# EAGLE board Qduino_Mini_Panel_v10 (EAGLE 7.3.0), part 1 of 11
DESIGNER: Quin from Qtechknow; VERSION: v10
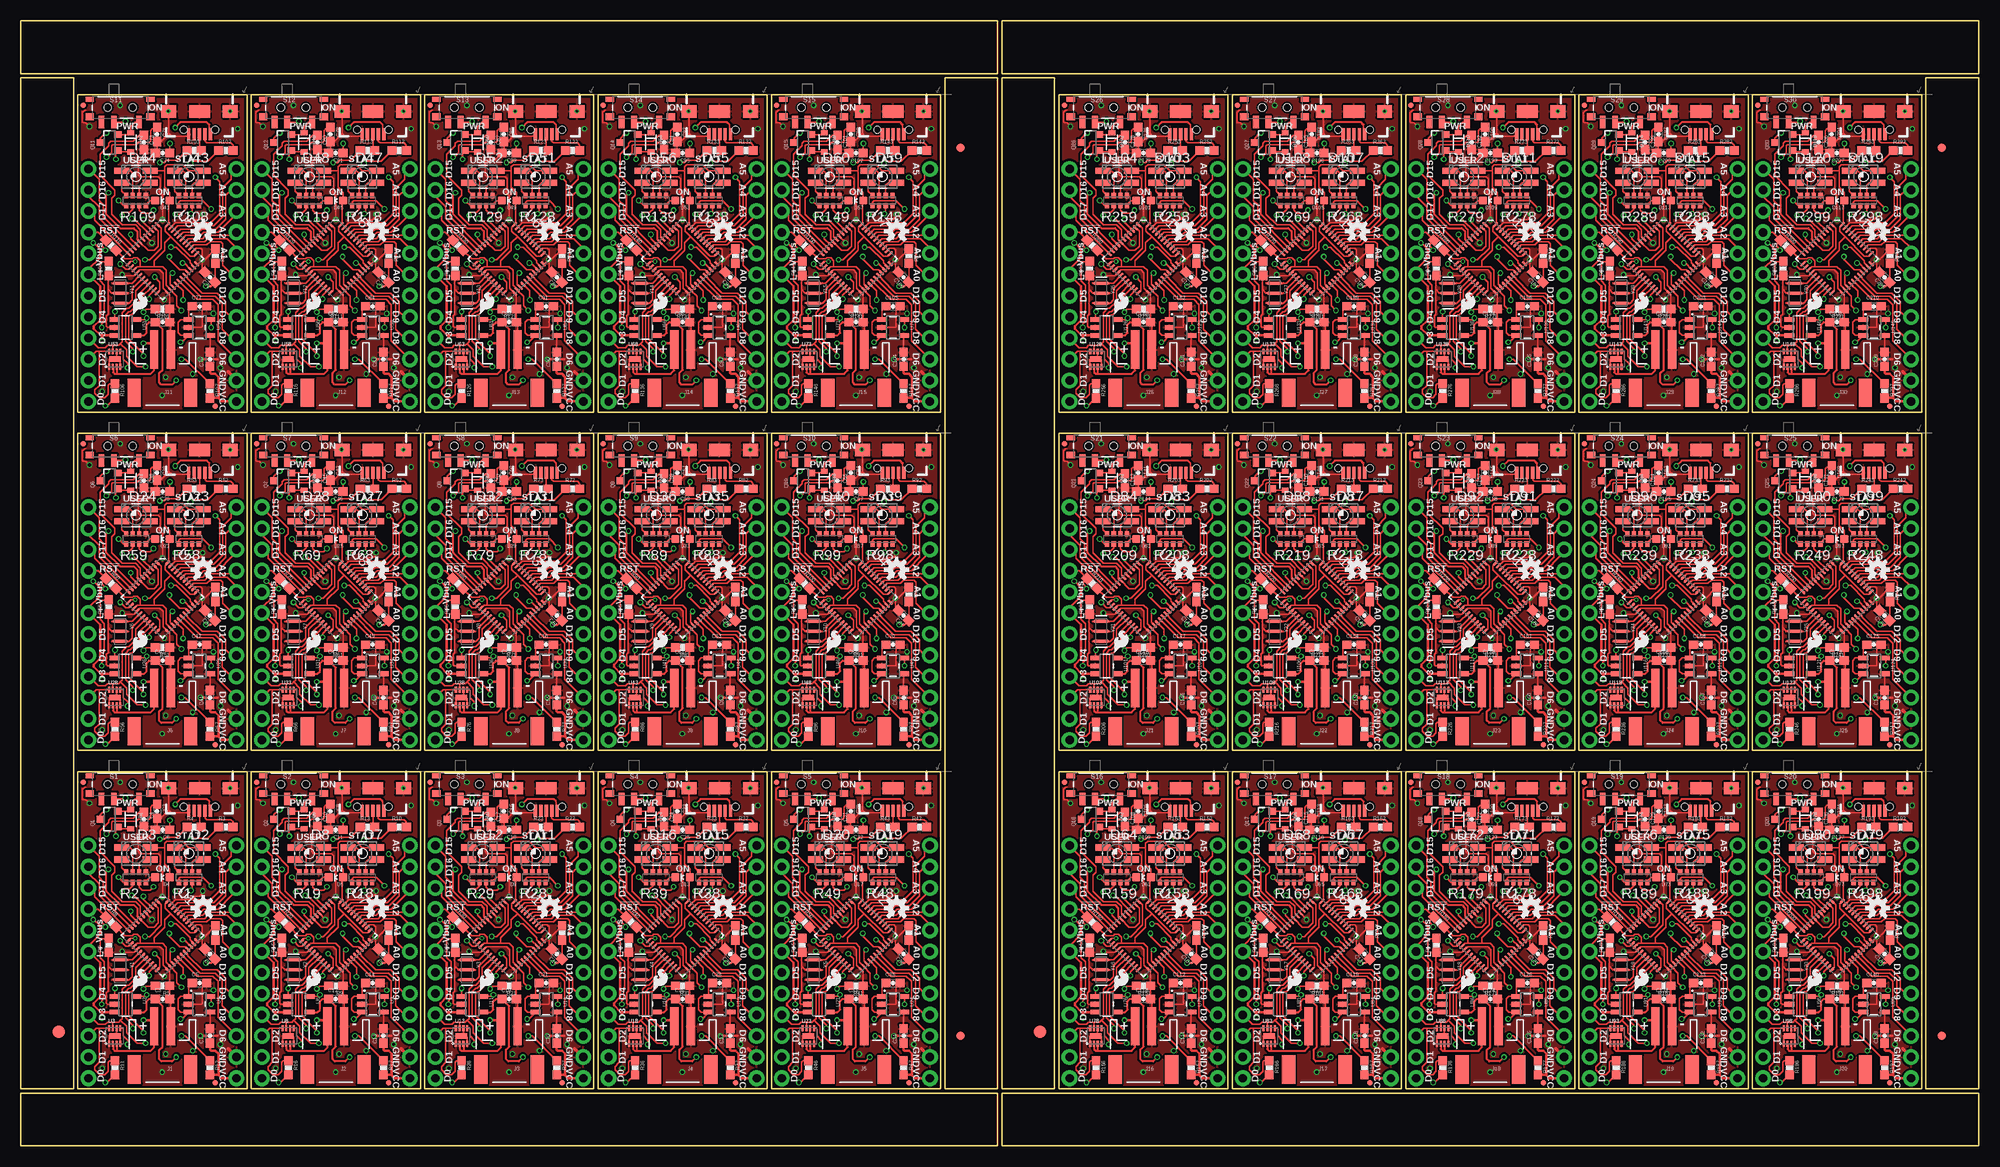
[diagram p0: board, top side]
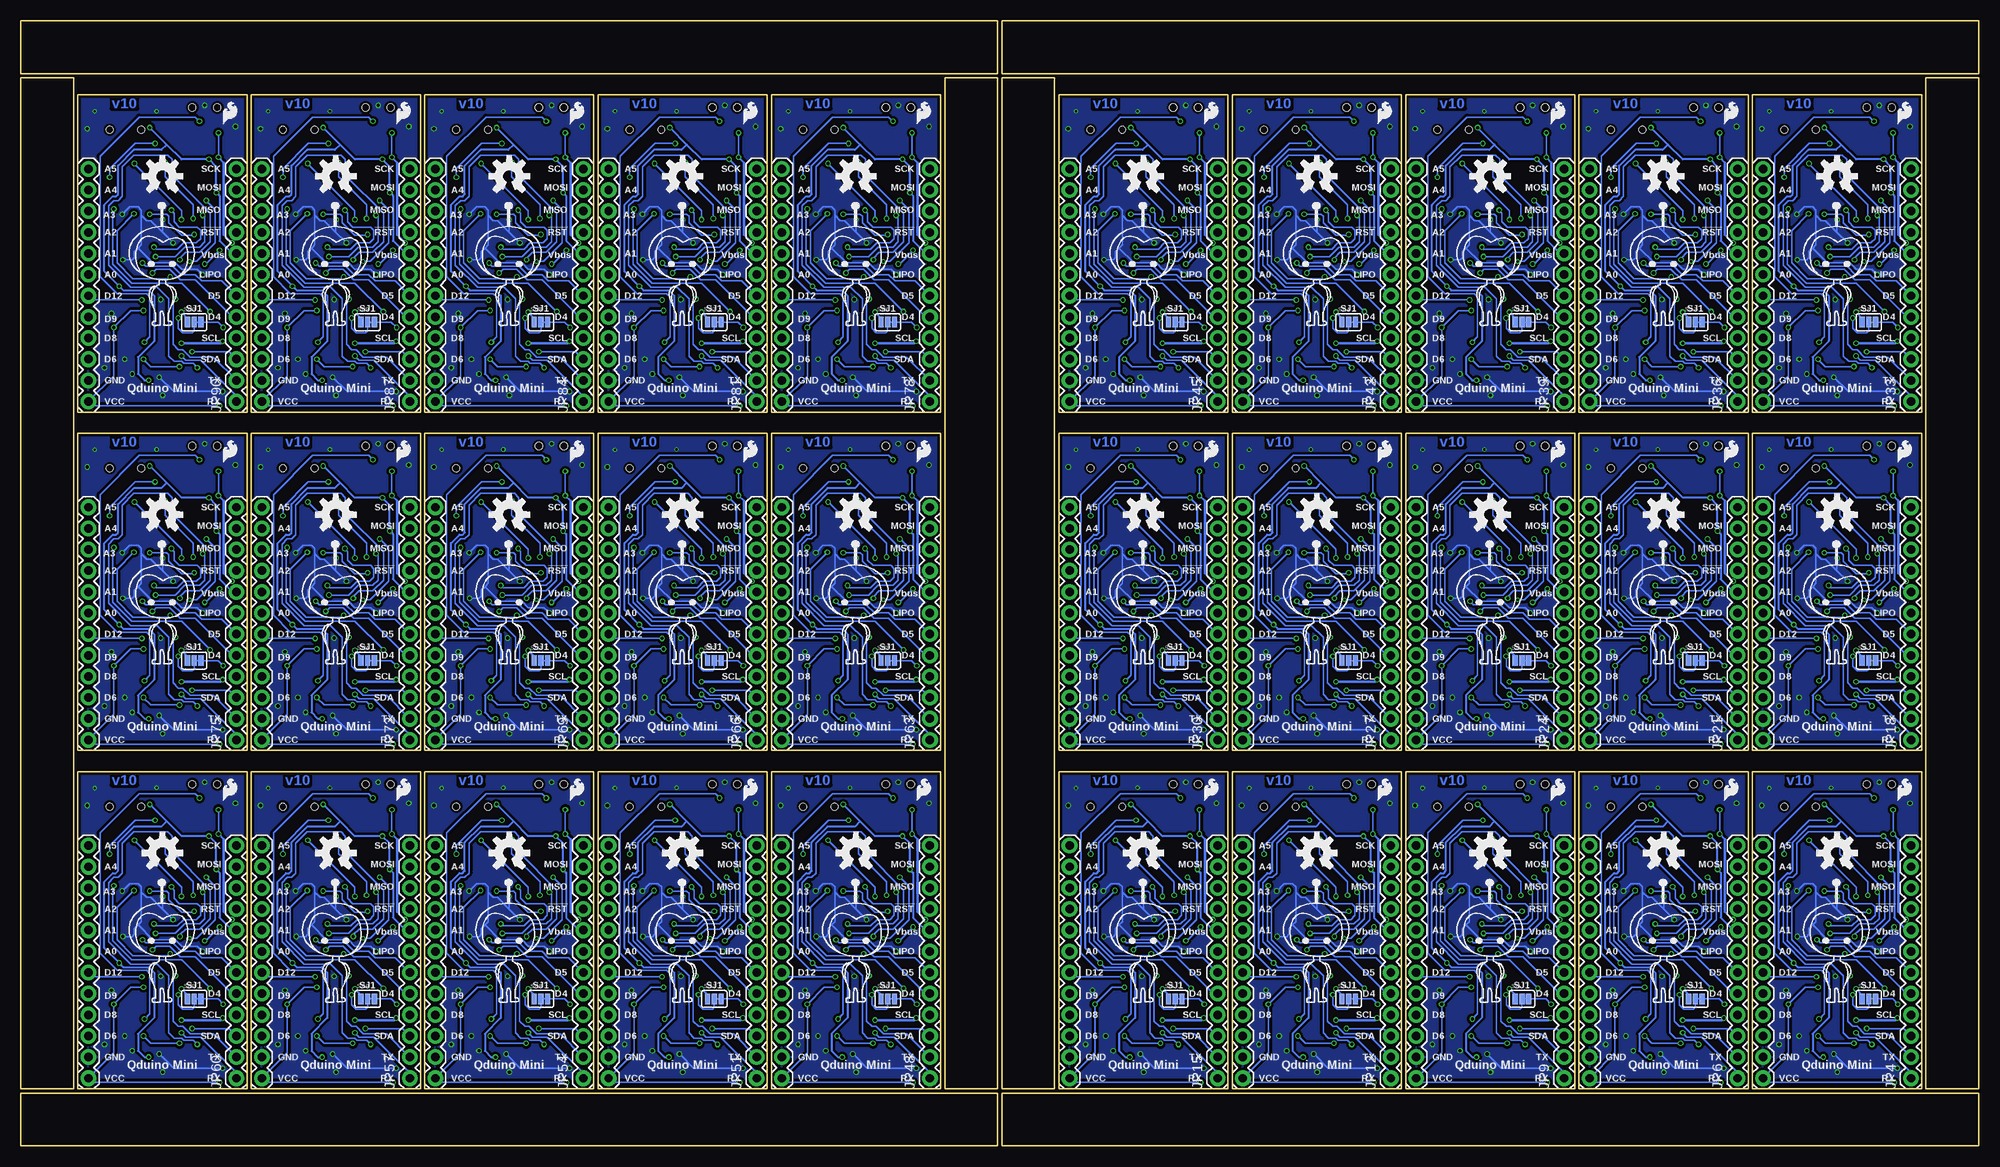
[diagram p1: board, bottom side, seen from below]

Size 235.2 x 135.13 mm. Coordinates in mm from the lower left corner, seen from the top.
Outline: 6.86,44.96 6.86,6.86 27.18,6.86 27.18,44.96 6.86,44.96
Outline: 27.69,44.96 27.69,6.86 48.01,6.86 48.01,44.96 27.69,44.96
Outline: 48.51,44.96 48.51,6.86 68.83,6.86 68.83,44.96 48.51,44.96
Outline: 69.34,44.96 69.34,6.86 89.66,6.86 89.66,44.96 69.34,44.96
Outline: 90.17,44.96 90.17,6.86 110.49,6.86 110.49,44.96 90.17,44.96
Outline: 6.86,85.6 6.86,47.5 27.18,47.5 27.18,85.6 6.86,85.6
Outline: 27.69,85.6 27.69,47.5 48.01,47.5 48.01,85.6 27.69,85.6
Outline: 48.51,85.6 48.51,47.5 68.83,47.5 68.83,85.6 48.51,85.6
Outline: 69.34,85.6 69.34,47.5 89.66,47.5 89.66,85.6 69.34,85.6
Outline: 90.17,85.6 90.17,47.5 110.49,47.5 110.49,85.6 90.17,85.6
Outline: 6.86,126.24 6.86,88.14 27.18,88.14 27.18,126.24 6.86,126.24
Outline: 27.69,126.24 27.69,88.14 48.01,88.14 48.01,126.24 27.69,126.24
Outline: 48.51,126.24 48.51,88.14 68.83,88.14 68.83,126.24 48.51,126.24
Outline: 69.34,126.24 69.34,88.14 89.66,88.14 89.66,126.24 69.34,126.24
Outline: 90.17,126.24 90.17,88.14 110.49,88.14 110.49,126.24 90.17,126.24
Outline: 6.35,6.86 6.35,128.27 0,128.27 0,6.86 6.35,6.86
Outline: 0,0 117.35,0 117.35,6.35 0,6.35 0,0
Outline: 117.35,6.86 117.35,128.27 111,128.27 111,6.86 117.35,6.86
Outline: 117.35,135.13 0,135.13 0,128.78 117.35,128.78 117.35,135.13
Outline: 124.71,44.96 124.71,6.86 145.03,6.86 145.03,44.96 124.71,44.96
Outline: 145.54,44.96 145.54,6.86 165.86,6.86 165.86,44.96 145.54,44.96
Outline: 166.37,44.96 166.37,6.86 186.69,6.86 186.69,44.96 166.37,44.96
Outline: 187.2,44.96 187.2,6.86 207.52,6.86 207.52,44.96 187.2,44.96
Outline: 208.03,44.96 208.03,6.86 228.35,6.86 228.35,44.96 208.03,44.96
Outline: 124.71,85.6 124.71,47.5 145.03,47.5 145.03,85.6 124.71,85.6
Outline: 145.54,85.6 145.54,47.5 165.86,47.5 165.86,85.6 145.54,85.6
Outline: 166.37,85.6 166.37,47.5 186.69,47.5 186.69,85.6 166.37,85.6
Outline: 187.2,85.6 187.2,47.5 207.52,47.5 207.52,85.6 187.2,85.6
Outline: 208.03,85.6 208.03,47.5 228.35,47.5 228.35,85.6 208.03,85.6
Outline: 124.71,126.24 124.71,88.14 145.03,88.14 145.03,126.24 124.71,126.24
Outline: 145.54,126.24 145.54,88.14 165.86,88.14 165.86,126.24 145.54,126.24
Outline: 166.37,126.24 166.37,88.14 186.69,88.14 186.69,126.24 166.37,126.24
Outline: 187.2,126.24 187.2,88.14 207.52,88.14 207.52,126.24 187.2,126.24
Outline: 208.03,126.24 208.03,88.14 228.35,88.14 228.35,126.24 208.03,126.24
Outline: 124.21,6.86 124.21,128.27 117.86,128.27 117.86,6.86 124.21,6.86
Outline: 117.86,0 235.2,0 235.2,6.35 117.86,6.35 117.86,0
Outline: 235.2,6.86 235.2,128.27 228.85,128.27 228.85,6.86 235.2,6.86
Outline: 235.2,135.13 117.86,135.13 117.86,128.78 235.2,128.78 235.2,135.13
Copper layers (1*16): Top 0.035mm / dielectric 1.5mm / Bottom 0.035mm
Design rules "Gold_Phoenix_Standard_Spec_2_layer": minimum track width 5mil, minimum drill 6mil, track to track 5mil, track to pad 5mil, pad to pad 5mil, via to via 5mil, smd to smd 5mil, copper to edge 8mil, drill to drill 8mil, minimum pad ring 5mil, minimum via ring 5mil, stop-mask expansion 4mil, vias tented up to drill 20mil, thermal gap 10mil
Net classes: 2 gnd: width 0.254 mm, drill 0.61 mm, clearance 0.254 mm

## Footprints (pad centres in the part's own frame; a part is rotated, then mirrored left to right if it is on the bottom)
0603-CAP = smd 1.1 x 1: 1 -0.85,0; 2 0.85,0
SOD-323 = smd 0.63 x 0.83: A 1.15,0; C -1.15,0
P-LCC-4-3 = smd 0.75 x 1.8: 1 0.725,1.7; 2 -0.725,1.7; 3 -0.725,-1.7; 4 0.725,-1.7
LED-0603 = smd 1 x 1: A 0,-0.877; C 0,0.877
FIDUCIAL-1.5X3 = smd 1.5 x 1.5: 1 0,0
FIDUCIAL-1X2 = smd 1 x 1: 1 0,0
MICRO-FIDUCIAL = smd 0.635 x 0.635: 1 0,0
JST-2-SMD = smd 1 x 4.6: 1 -1,-3.7; 2 1,-3.7 | smd 1.6 x 3.4: NC1 -3.4,1.5; NC2 3.4,1.5
USB-B-MICRO-SMD_V03 = smd 1.45 x 0.4: D+1 2.725,0; D-1 2.725,0.65; GND1 2.725,-1.3; ID1 2.725,-0.65; VBUS1 2.725,1.3 | smd 1.5 x 1.8: SHIELD1 0,3.685; SHIELD2 0,-3.685 | smd 1.5 x 2.5: SHIELD3 0,0 | hole 0.85: 2.2,1.9; 2.2,-1.9
1X12 = drill 1.016 pad 1.88: 1 0,0; 2 2.54,0; 3 5.08,0; 4 7.62,0; 5 10.16,0; 6 12.7,0; 7 15.24,0; 8 17.78,0; 9 20.32,0; 10 22.86,0; 11 25.4,0; 12 27.94,0
SOT23-3 = smd 0.8 x 0.9: 1 -0.95,-1; 2 0.95,-1; 3 0,1.1
0603-ARV = smd 0.5 x 0.65: 1 -1.2,-0.625; 2 -0.4,-0.625; 3 0.4,-0.625; 4 1.2,-0.625; 5 1.2,0.625; 6 0.4,0.625; 7 -0.4,0.625; 8 -1.2,0.625
0603-RES = smd 1.1 x 1: 1 -0.85,0; 2 0.85,0
SWITCH-SPST-SMD-A = smd 0.7 x 1.5: 1 -2.25,-1.75; 2 -0.75,-1.75; 3 2.25,-1.75 | smd 1 x 0.6: GND1 -3.65,1; GND3 3.65,1 | smd 1 x 0.8: GND2 -3.65,-1.1; GND4 3.65,-1.1 | hole 0.9: -1.5,0; 1.5,0
PAD-JUMPER-3-2OF3_NC_BY_TRACE_YES_SILK_FULL_BOX = smd 0.635 x 1.27: 1 -0.813,0; 2 0,0; 3 0.813,0
QFN-44-NOPAD_1:1-LESS_PASTE = smd 0.8 x 0.3: 1 -3.337,2.458; 2 -3.337,1.958; 3 -3.337,1.479; 4 -3.337,0.979; 5 -3.337,0.5; 6 -3.337,0; 7 -3.337,-0.5; 8 -3.337,-0.979; 9 -3.337,-1.479; 10 -3.337,-1.958; 11 -3.337,-2.458; 23 3.337,-2.458; 24 3.337,-1.958; 25 3.337,-1.479; 26 3.337,-0.979; 27 3.337,-0.5; 28 3.337,0; 29 3.337,0.5; 30 3.337,0.979; 31 3.337,1.479; 32 3.337,1.958; 33 3.337,2.458 | smd 0.3 x 0.8: 12 -2.458,-3.337; 13 -1.958,-3.337; 14 -1.479,-3.337; 15 -0.979,-3.337; 16 -0.5,-3.337; 17 0,-3.337; 18 0.5,-3.337; 19 0.979,-3.337; 20 1.479,-3.337; 21 1.958,-3.337; 22 2.458,-3.337; 34 2.458,3.337; 35 1.958,3.337; 36 1.479,3.337; 37 0.979,3.337; 38 0.5,3.337; 39 0,3.337; 40 -0.5,3.337; 41 -0.979,3.337; 42 -1.479,3.337; 43 -1.958,3.337; 44 -2.458,3.337
SOT23-5 = smd 0.55 x 1.2: 1 -0.95,-1.3; 2 0,-1.3; 3 0.95,-1.3; 4 0.95,1.3; 5 -0.95,1.3
DFN-8 = smd 0.25 x 0.7: P$1 -0.688,-0.92; P$2 -0.238,-0.92; P$3 0.212,-0.92; P$4 0.662,-0.92; P$5 0.662,0.93; P$6 0.212,0.93; P$7 -0.238,0.93; P$8 -0.688,0.93 | smd 1.37 x 0.64: P$9 -0.013,0.005
RESONATOR-SMD = smd 0.45 x 1.905: 1 -1.2,0; 2 0,0; 3 1.2,0

## Placement (x,y rotation side)
C1  4.7uF  [0603-CAP]  22.73,23.05 135 top
C2  4.7uF  [0603-CAP]  16.38,40.2 270 top
C3  1uF  [0603-CAP]  17.02,17.65 0 top
C4  1uF  [0603-CAP]  14.8,39.24 270 top
C5  1uF  [0603-CAP]  21.46,19.56 0 top
C6  0.1uF  [0603-CAP]  17.02,37.97 180 top
C7  2.2uF  [0603-CAP]  22.73,13.21 90 top
C8  4.7uF  [0603-CAP]  37.21,40.2 270 top
C9  4.7uF  [0603-CAP]  43.56,23.05 135 top
C10  1uF  [0603-CAP]  35.62,39.24 270 top
C11  0.1uF  [0603-CAP]  37.85,37.97 180 top
C12  1uF  [0603-CAP]  37.85,17.65 0 top
C13  2.2uF  [0603-CAP]  43.56,13.21 90 top
C14  1uF  [0603-CAP]  42.29,19.56 0 top
C15  4.7uF  [0603-CAP]  58.04,40.2 270 top
C16  4.7uF  [0603-CAP]  64.39,23.05 135 top
C17  1uF  [0603-CAP]  56.45,39.24 270 top
C18  0.1uF  [0603-CAP]  58.67,37.97 180 top
C19  1uF  [0603-CAP]  58.67,17.65 0 top
C20  2.2uF  [0603-CAP]  64.39,13.21 90 top
C21  1uF  [0603-CAP]  63.12,19.56 0 top
C22  4.7uF  [0603-CAP]  78.87,40.2 270 top
C23  4.7uF  [0603-CAP]  85.22,23.05 135 top
C24  1uF  [0603-CAP]  77.28,39.24 270 top
C25  0.1uF  [0603-CAP]  79.5,37.97 180 top
C26  1uF  [0603-CAP]  79.5,17.65 0 top
C27  2.2uF  [0603-CAP]  85.22,13.21 90 top
C28  1uF  [0603-CAP]  83.95,19.56 0 top
C29  4.7uF  [0603-CAP]  99.69,40.2 270 top
C30  4.7uF  [0603-CAP]  106.05,23.05 135 top
C31  1uF  [0603-CAP]  98.11,39.24 270 top
C32  0.1uF  [0603-CAP]  100.33,37.97 180 top
C33  1uF  [0603-CAP]  100.33,17.65 0 top
C34  2.2uF  [0603-CAP]  106.05,13.21 90 top
C35  1uF  [0603-CAP]  104.78,19.56 0 top
C36  4.7uF  [0603-CAP]  16.38,80.84 270 top
C37  4.7uF  [0603-CAP]  22.73,63.69 135 top
C38  1uF  [0603-CAP]  14.8,79.88 270 top
C39  0.1uF  [0603-CAP]  17.02,78.61 180 top
C40  1uF  [0603-CAP]  17.02,58.29 0 top
C41  2.2uF  [0603-CAP]  22.73,53.85 90 top
C42  1uF  [0603-CAP]  21.46,60.2 0 top
C43  4.7uF  [0603-CAP]  37.21,80.84 270 top
C44  4.7uF  [0603-CAP]  43.56,63.69 135 top
C45  1uF  [0603-CAP]  35.62,79.88 270 top
C46  0.1uF  [0603-CAP]  37.85,78.61 180 top
C47  1uF  [0603-CAP]  37.85,58.29 0 top
C48  2.2uF  [0603-CAP]  43.56,53.85 90 top
C49  1uF  [0603-CAP]  42.29,60.2 0 top
C50  4.7uF  [0603-CAP]  58.04,80.84 270 top
C51  4.7uF  [0603-CAP]  64.39,63.69 135 top
C52  1uF  [0603-CAP]  56.45,79.88 270 top
C53  0.1uF  [0603-CAP]  58.67,78.61 180 top
C54  1uF  [0603-CAP]  58.67,58.29 0 top
C55  2.2uF  [0603-CAP]  64.39,53.85 90 top
C56  1uF  [0603-CAP]  63.12,60.2 0 top
C57  4.7uF  [0603-CAP]  78.87,80.84 270 top
C58  4.7uF  [0603-CAP]  85.22,63.69 135 top
C59  1uF  [0603-CAP]  77.28,79.88 270 top
C60  0.1uF  [0603-CAP]  79.5,78.61 180 top
C61  1uF  [0603-CAP]  79.5,58.29 0 top
C62  2.2uF  [0603-CAP]  85.22,53.85 90 top
C63  1uF  [0603-CAP]  83.95,60.2 0 top
C64  4.7uF  [0603-CAP]  99.69,80.84 270 top
C65  4.7uF  [0603-CAP]  106.05,63.69 135 top
C66  1uF  [0603-CAP]  98.11,79.88 270 top
C67  0.1uF  [0603-CAP]  100.33,78.61 180 top
C68  1uF  [0603-CAP]  100.33,58.29 0 top
C69  2.2uF  [0603-CAP]  106.05,53.85 90 top
C70  1uF  [0603-CAP]  104.78,60.2 0 top
C71  4.7uF  [0603-CAP]  16.38,121.48 270 top
C72  4.7uF  [0603-CAP]  22.73,104.33 135 top
C73  1uF  [0603-CAP]  14.8,120.52 270 top
C74  0.1uF  [0603-CAP]  17.02,119.25 180 top
C75  1uF  [0603-CAP]  17.02,98.93 0 top
C76  2.2uF  [0603-CAP]  22.73,94.49 90 top
C77  1uF  [0603-CAP]  21.46,100.84 0 top
C78  4.7uF  [0603-CAP]  37.21,121.48 270 top
C79  4.7uF  [0603-CAP]  43.56,104.33 135 top
C80  1uF  [0603-CAP]  35.62,120.52 270 top
C81  0.1uF  [0603-CAP]  37.85,119.25 180 top
C82  1uF  [0603-CAP]  37.85,98.93 0 top
C83  2.2uF  [0603-CAP]  43.56,94.49 90 top
C84  1uF  [0603-CAP]  42.29,100.84 0 top
C85  4.7uF  [0603-CAP]  58.04,121.48 270 top
C86  4.7uF  [0603-CAP]  64.39,104.33 135 top
C87  1uF  [0603-CAP]  56.45,120.52 270 top
C88  0.1uF  [0603-CAP]  58.67,119.25 180 top
C89  1uF  [0603-CAP]  58.67,98.93 0 top
C90  2.2uF  [0603-CAP]  64.39,94.49 90 top
C91  1uF  [0603-CAP]  63.12,100.84 0 top
C92  4.7uF  [0603-CAP]  78.87,121.48 270 top
C93  4.7uF  [0603-CAP]  85.22,104.33 135 top
C94  1uF  [0603-CAP]  77.28,120.52 270 top
C95  0.1uF  [0603-CAP]  79.5,119.25 180 top
C96  1uF  [0603-CAP]  79.5,98.93 0 top
C97  2.2uF  [0603-CAP]  85.22,94.49 90 top
C98  1uF  [0603-CAP]  83.95,100.84 0 top
C99  4.7uF  [0603-CAP]  99.69,121.48 270 top
C100  4.7uF  [0603-CAP]  106.05,104.33 135 top
C101  1uF  [0603-CAP]  98.11,120.52 270 top
C102  0.1uF  [0603-CAP]  100.33,119.25 180 top
C103  1uF  [0603-CAP]  100.33,98.93 0 top
C104  2.2uF  [0603-CAP]  106.05,94.49 90 top
C105  1uF  [0603-CAP]  104.78,100.84 0 top
C106  4.7uF  [0603-CAP]  134.24,40.2 270 top
C107  4.7uF  [0603-CAP]  140.59,23.05 135 top
C108  1uF  [0603-CAP]  132.65,39.24 270 top
C109  0.1uF  [0603-CAP]  134.87,37.97 180 top
C110  1uF  [0603-CAP]  134.87,17.65 0 top
C111  2.2uF  [0603-CAP]  140.59,13.21 90 top
C112  1uF  [0603-CAP]  139.32,19.56 0 top
C113  4.7uF  [0603-CAP]  155.07,40.2 270 top
C114  4.7uF  [0603-CAP]  161.42,23.05 135 top
C115  1uF  [0603-CAP]  153.48,39.24 270 top
C116  0.1uF  [0603-CAP]  155.7,37.97 180 top
C117  1uF  [0603-CAP]  155.7,17.65 0 top
C118  2.2uF  [0603-CAP]  161.42,13.21 90 top
C119  1uF  [0603-CAP]  160.15,19.56 0 top
C120  4.7uF  [0603-CAP]  175.9,40.2 270 top
C121  4.7uF  [0603-CAP]  182.25,23.05 135 top
C122  1uF  [0603-CAP]  174.31,39.24 270 top
C123  0.1uF  [0603-CAP]  176.53,37.97 180 top
C124  1uF  [0603-CAP]  176.53,17.65 0 top
C125  2.2uF  [0603-CAP]  182.25,13.21 90 top
C126  1uF  [0603-CAP]  180.97,19.56 0 top
C127  4.7uF  [0603-CAP]  196.72,40.2 270 top
C128  4.7uF  [0603-CAP]  203.07,23.05 135 top
C129  1uF  [0603-CAP]  195.14,39.24 270 top
C130  0.1uF  [0603-CAP]  197.36,37.97 180 top
C131  1uF  [0603-CAP]  197.36,17.65 0 top
C132  2.2uF  [0603-CAP]  203.07,13.21 90 top
C133  1uF  [0603-CAP]  201.8,19.56 0 top
C134  4.7uF  [0603-CAP]  217.55,40.2 270 top
C135  4.7uF  [0603-CAP]  223.9,23.05 135 top
C136  1uF  [0603-CAP]  215.96,39.24 270 top
C137  0.1uF  [0603-CAP]  218.19,37.97 180 top
C138  1uF  [0603-CAP]  218.19,17.65 0 top
C139  2.2uF  [0603-CAP]  223.9,13.21 90 top
C140  1uF  [0603-CAP]  222.63,19.56 0 top
C141  4.7uF  [0603-CAP]  134.24,80.84 270 top
C142  4.7uF  [0603-CAP]  140.59,63.69 135 top
C143  1uF  [0603-CAP]  132.65,79.88 270 top
C144  0.1uF  [0603-CAP]  134.87,78.61 180 top
C145  1uF  [0603-CAP]  134.87,58.29 0 top
C146  2.2uF  [0603-CAP]  140.59,53.85 90 top
C147  1uF  [0603-CAP]  139.32,60.2 0 top
C148  4.7uF  [0603-CAP]  155.07,80.84 270 top
C149  4.7uF  [0603-CAP]  161.42,63.69 135 top
C150  1uF  [0603-CAP]  153.48,79.88 270 top
C151  0.1uF  [0603-CAP]  155.7,78.61 180 top
C152  1uF  [0603-CAP]  155.7,58.29 0 top
C153  2.2uF  [0603-CAP]  161.42,53.85 90 top
C154  1uF  [0603-CAP]  160.15,60.2 0 top
C155  4.7uF  [0603-CAP]  175.9,80.84 270 top
C156  4.7uF  [0603-CAP]  182.25,63.69 135 top
C157  1uF  [0603-CAP]  174.31,79.88 270 top
C158  0.1uF  [0603-CAP]  176.53,78.61 180 top
C159  1uF  [0603-CAP]  176.53,58.29 0 top
C160  2.2uF  [0603-CAP]  182.25,53.85 90 top
C161  1uF  [0603-CAP]  180.97,60.2 0 top
C162  4.7uF  [0603-CAP]  196.72,80.84 270 top
C163  4.7uF  [0603-CAP]  203.07,63.69 135 top
C164  1uF  [0603-CAP]  195.14,79.88 270 top
C165  0.1uF  [0603-CAP]  197.36,78.61 180 top
C166  1uF  [0603-CAP]  197.36,58.29 0 top
C167  2.2uF  [0603-CAP]  203.07,53.85 90 top
C168  1uF  [0603-CAP]  201.8,60.2 0 top
C169  4.7uF  [0603-CAP]  217.55,80.84 270 top
C170  4.7uF  [0603-CAP]  223.9,63.69 135 top
C171  1uF  [0603-CAP]  215.96,79.88 270 top
C172  0.1uF  [0603-CAP]  218.19,78.61 180 top
C173  1uF  [0603-CAP]  218.19,58.29 0 top
C174  2.2uF  [0603-CAP]  223.9,53.85 90 top
C175  1uF  [0603-CAP]  222.63,60.2 0 top
C176  4.7uF  [0603-CAP]  134.24,121.48 270 top
C177  4.7uF  [0603-CAP]  140.59,104.33 135 top
C178  1uF  [0603-CAP]  132.65,120.52 270 top
C179  0.1uF  [0603-CAP]  134.87,119.25 180 top
C180  1uF  [0603-CAP]  134.87,98.93 0 top
C181  2.2uF  [0603-CAP]  140.59,94.49 90 top
C182  1uF  [0603-CAP]  139.32,100.84 0 top
C183  4.7uF  [0603-CAP]  155.07,121.48 270 top
C184  4.7uF  [0603-CAP]  161.42,104.33 135 top
C185  1uF  [0603-CAP]  153.48,120.52 270 top
C186  0.1uF  [0603-CAP]  155.7,119.25 180 top
C187  1uF  [0603-CAP]  155.7,98.93 0 top
C188  2.2uF  [0603-CAP]  161.42,94.49 90 top
C189  1uF  [0603-CAP]  160.15,100.84 0 top
C190  4.7uF  [0603-CAP]  175.9,121.48 270 top
C191  4.7uF  [0603-CAP]  182.25,104.33 135 top
C192  1uF  [0603-CAP]  174.31,120.52 270 top
C193  0.1uF  [0603-CAP]  176.53,119.25 180 top
C194  1uF  [0603-CAP]  176.53,98.93 0 top
C195  2.2uF  [0603-CAP]  182.25,94.49 90 top
C196  1uF  [0603-CAP]  180.97,100.84 0 top
C197  4.7uF  [0603-CAP]  196.72,121.48 270 top
C198  4.7uF  [0603-CAP]  203.07,104.33 135 top
C199  1uF  [0603-CAP]  195.14,120.52 270 top
C200  0.1uF  [0603-CAP]  197.36,119.25 180 top
C201  1uF  [0603-CAP]  197.36,98.93 0 top
C202  2.2uF  [0603-CAP]  203.07,94.49 90 top
C203  1uF  [0603-CAP]  201.8,100.84 0 top
C204  4.7uF  [0603-CAP]  217.55,121.48 270 top
C205  4.7uF  [0603-CAP]  223.9,104.33 135 top
C206  1uF  [0603-CAP]  215.96,120.52 270 top
C207  0.1uF  [0603-CAP]  218.19,119.25 180 top
C208  1uF  [0603-CAP]  218.19,98.93 0 top
C209  2.2uF  [0603-CAP]  223.9,94.49 90 top
C210  1uF  [0603-CAP]  222.63,100.84 0 top
D1  BAT20J  [SOD-323]  13.21,39.24 270 top
D2  [P-LCC-4-3]  20.19,35.12 90 top
D3  [P-LCC-4-3]  13.84,35.12 90 top
D4  GREEN  [LED-0603]  17.02,32.26 90 top
D5  GREEN  [LED-0603]  37.85,32.26 90 top
D6  BAT20J  [SOD-323]  34.04,39.24 270 top
D7  [P-LCC-4-3]  41.02,35.12 90 top
D8  [P-LCC-4-3]  34.67,35.12 90 top
D9  GREEN  [LED-0603]  58.67,32.26 90 top
D10  BAT20J  [SOD-323]  54.86,39.24 270 top
D11  [P-LCC-4-3]  61.85,35.12 90 top
D12  [P-LCC-4-3]  55.5,35.12 90 top
D13  GREEN  [LED-0603]  79.5,32.26 90 top
D14  BAT20J  [SOD-323]  75.69,39.24 270 top
D15  [P-LCC-4-3]  82.68,35.12 90 top
D16  [P-LCC-4-3]  76.33,35.12 90 top
D17  GREEN  [LED-0603]  100.33,32.26 90 top
D18  BAT20J  [SOD-323]  96.52,39.24 270 top
D19  [P-LCC-4-3]  103.5,35.12 90 top
D20  [P-LCC-4-3]  97.16,35.12 90 top
D21  GREEN  [LED-0603]  17.02,72.9 90 top
D22  BAT20J  [SOD-323]  13.21,79.88 270 top
D23  [P-LCC-4-3]  20.19,75.76 90 top
D24  [P-LCC-4-3]  13.84,75.76 90 top
D25  GREEN  [LED-0603]  37.85,72.9 90 top
D26  BAT20J  [SOD-323]  34.04,79.88 270 top
D27  [P-LCC-4-3]  41.02,75.76 90 top
D28  [P-LCC-4-3]  34.67,75.76 90 top
D29  GREEN  [LED-0603]  58.67,72.9 90 top
D30  BAT20J  [SOD-323]  54.86,79.88 270 top
D31  [P-LCC-4-3]  61.85,75.76 90 top
D32  [P-LCC-4-3]  55.5,75.76 90 top
D33  GREEN  [LED-0603]  79.5,72.9 90 top
D34  BAT20J  [SOD-323]  75.69,79.88 270 top
D35  [P-LCC-4-3]  82.68,75.76 90 top
D36  [P-LCC-4-3]  76.33,75.76 90 top
D37  GREEN  [LED-0603]  100.33,72.9 90 top
D38  BAT20J  [SOD-323]  96.52,79.88 270 top
D39  [P-LCC-4-3]  103.5,75.76 90 top
D40  [P-LCC-4-3]  97.16,75.76 90 top
D41  GREEN  [LED-0603]  17.02,113.54 90 top
D42  BAT20J  [SOD-323]  13.21,120.52 270 top
D43  [P-LCC-4-3]  20.19,116.4 90 top
D44  [P-LCC-4-3]  13.84,116.4 90 top
D45  GREEN  [LED-0603]  37.85,113.54 90 top
D46  BAT20J  [SOD-323]  34.04,120.52 270 top
D47  [P-LCC-4-3]  41.02,116.4 90 top
D48  [P-LCC-4-3]  34.67,116.4 90 top
D49  GREEN  [LED-0603]  58.67,113.54 90 top
D50  BAT20J  [SOD-323]  54.86,120.52 270 top
D51  [P-LCC-4-3]  61.85,116.4 90 top
D52  [P-LCC-4-3]  55.5,116.4 90 top
D53  GREEN  [LED-0603]  79.5,113.54 90 top
D54  BAT20J  [SOD-323]  75.69,120.52 270 top
D55  [P-LCC-4-3]  82.68,116.4 90 top
D56  [P-LCC-4-3]  76.33,116.4 90 top
D57  GREEN  [LED-0603]  100.33,113.54 90 top
D58  BAT20J  [SOD-323]  96.52,120.52 270 top
D59  [P-LCC-4-3]  103.5,116.4 90 top
D60  [P-LCC-4-3]  97.16,116.4 90 top
D61  GREEN  [LED-0603]  134.87,32.26 90 top
D62  BAT20J  [SOD-323]  131.06,39.24 270 top
D63  [P-LCC-4-3]  138.05,35.12 90 top
D64  [P-LCC-4-3]  131.7,35.12 90 top
D65  GREEN  [LED-0603]  155.7,32.26 90 top
D66  BAT20J  [SOD-323]  151.89,39.24 270 top
D67  [P-LCC-4-3]  158.88,35.12 90 top
D68  [P-LCC-4-3]  152.53,35.12 90 top
D69  GREEN  [LED-0603]  176.53,32.26 90 top
D70  BAT20J  [SOD-323]  172.72,39.24 270 top
D71  [P-LCC-4-3]  179.71,35.12 90 top
D72  [P-LCC-4-3]  173.35,35.12 90 top
D73  GREEN  [LED-0603]  197.36,32.26 90 top
D74  BAT20J  [SOD-323]  193.55,39.24 270 top
D75  [P-LCC-4-3]  200.53,35.12 90 top
D76  [P-LCC-4-3]  194.18,35.12 90 top
D77  GREEN  [LED-0603]  218.19,32.26 90 top
D78  BAT20J  [SOD-323]  214.38,39.24 270 top
D79  [P-LCC-4-3]  221.36,35.12 90 top
D80  [P-LCC-4-3]  215.01,35.12 90 top
D81  GREEN  [LED-0603]  134.87,72.9 90 top
D82  BAT20J  [SOD-323]  131.06,79.88 270 top
D83  [P-LCC-4-3]  138.05,75.76 90 top
D84  [P-LCC-4-3]  131.7,75.76 90 top
D85  GREEN  [LED-0603]  155.7,72.9 90 top
D86  BAT20J  [SOD-323]  151.89,79.88 270 top
D87  [P-LCC-4-3]  158.88,75.76 90 top
D88  [P-LCC-4-3]  152.53,75.76 90 top
D89  GREEN  [LED-0603]  176.53,72.9 90 top
D90  BAT20J  [SOD-323]  172.72,79.88 270 top
D91  [P-LCC-4-3]  179.71,75.76 90 top
D92  [P-LCC-4-3]  173.35,75.76 90 top
D93  GREEN  [LED-0603]  197.36,72.9 90 top
D94  BAT20J  [SOD-323]  193.55,79.88 270 top
D95  [P-LCC-4-3]  200.53,75.76 90 top
D96  [P-LCC-4-3]  194.18,75.76 90 top
D97  GREEN  [LED-0603]  218.19,72.9 90 top
D98  BAT20J  [SOD-323]  214.38,79.88 270 top
D99  [P-LCC-4-3]  221.36,75.76 90 top
D100  [P-LCC-4-3]  215.01,75.76 90 top
D101  GREEN  [LED-0603]  134.87,113.54 90 top
D102  BAT20J  [SOD-323]  131.06,120.52 270 top
D103  [P-LCC-4-3]  138.05,116.4 90 top
D104  [P-LCC-4-3]  131.7,116.4 90 top
D105  GREEN  [LED-0603]  155.7,113.54 90 top
D106  BAT20J  [SOD-323]  151.89,120.52 270 top
D107  [P-LCC-4-3]  158.88,116.4 90 top
D108  [P-LCC-4-3]  152.53,116.4 90 top
D109  GREEN  [LED-0603]  176.53,113.54 90 top
D110  BAT20J  [SOD-323]  172.72,120.52 270 top
D111  [P-LCC-4-3]  179.71,116.4 90 top
D112  [P-LCC-4-3]  173.35,116.4 90 top
D113  GREEN  [LED-0603]  197.36,113.54 90 top
D114  BAT20J  [SOD-323]  193.55,120.52 270 top
D115  [P-LCC-4-3]  200.53,116.4 90 top
D116  [P-LCC-4-3]  194.18,116.4 90 top
D117  GREEN  [LED-0603]  218.19,113.54 90 top
D118  BAT20J  [SOD-323]  214.38,120.52 270 top
D119  [P-LCC-4-3]  221.36,116.4 90 top
D120  [P-LCC-4-3]  215.01,116.4 90 top
E$1  [FIDUCIAL-1.5X3]  4.57,13.72 0 top
E$2  [FIDUCIAL-1X2]  230.76,13.21 0 top
E$3  [FIDUCIAL-1X2]  230.76,119.89 180 top
E$4  [FIDUCIAL-1X2]  112.9,13.21 0 top
E$5  [FIDUCIAL-1X2]  112.9,119.89 180 top
E$6  [FIDUCIAL-1.5X3]  122.43,13.72 0 top
FID1  FIDUCIALUFIDUCIAL  [MICRO-FIDUCIAL]  7.49,43.69 0 top
FID2  FIDUCIALUFIDUCIAL  [MICRO-FIDUCIAL]  23.37,7.57 0 top
FID3  FIDUCIALUFIDUCIAL  [MICRO-FIDUCIAL]  28.32,43.69 0 top
FID4  FIDUCIALUFIDUCIAL  [MICRO-FIDUCIAL]  44.2,7.57 0 top
FID5  FIDUCIALUFIDUCIAL  [MICRO-FIDUCIAL]  49.15,43.69 0 top
FID6  FIDUCIALUFIDUCIAL  [MICRO-FIDUCIAL]  65.02,7.57 0 top
FID7  FIDUCIALUFIDUCIAL  [MICRO-FIDUCIAL]  69.98,43.69 0 top
FID8  FIDUCIALUFIDUCIAL  [MICRO-FIDUCIAL]  85.85,7.57 0 top
FID9  FIDUCIALUFIDUCIAL  [MICRO-FIDUCIAL]  90.81,43.69 0 top
FID10  FIDUCIALUFIDUCIAL  [MICRO-FIDUCIAL]  106.68,7.57 0 top
FID11  FIDUCIALUFIDUCIAL  [MICRO-FIDUCIAL]  7.49,84.33 0 top
FID12  FIDUCIALUFIDUCIAL  [MICRO-FIDUCIAL]  23.37,48.21 0 top
FID13  FIDUCIALUFIDUCIAL  [MICRO-FIDUCIAL]  28.32,84.33 0 top
FID14  FIDUCIALUFIDUCIAL  [MICRO-FIDUCIAL]  44.2,48.21 0 top
FID15  FIDUCIALUFIDUCIAL  [MICRO-FIDUCIAL]  49.15,84.33 0 top
FID16  FIDUCIALUFIDUCIAL  [MICRO-FIDUCIAL]  65.02,48.21 0 top
FID17  FIDUCIALUFIDUCIAL  [MICRO-FIDUCIAL]  69.98,84.33 0 top
FID18  FIDUCIALUFIDUCIAL  [MICRO-FIDUCIAL]  85.85,48.21 0 top
FID19  FIDUCIALUFIDUCIAL  [MICRO-FIDUCIAL]  90.81,84.33 0 top
FID20  FIDUCIALUFIDUCIAL  [MICRO-FIDUCIAL]  106.68,48.21 0 top
FID21  FIDUCIALUFIDUCIAL  [MICRO-FIDUCIAL]  7.49,124.97 0 top
FID22  FIDUCIALUFIDUCIAL  [MICRO-FIDUCIAL]  23.37,88.85 0 top
FID23  FIDUCIALUFIDUCIAL  [MICRO-FIDUCIAL]  28.32,124.97 0 top
FID24  FIDUCIALUFIDUCIAL  [MICRO-FIDUCIAL]  44.2,88.85 0 top
FID25  FIDUCIALUFIDUCIAL  [MICRO-FIDUCIAL]  49.15,124.97 0 top
FID26  FIDUCIALUFIDUCIAL  [MICRO-FIDUCIAL]  65.02,88.85 0 top
FID27  FIDUCIALUFIDUCIAL  [MICRO-FIDUCIAL]  69.98,124.97 0 top
FID28  FIDUCIALUFIDUCIAL  [MICRO-FIDUCIAL]  85.85,88.85 0 top
FID29  FIDUCIALUFIDUCIAL  [MICRO-FIDUCIAL]  90.81,124.97 0 top
FID30  FIDUCIALUFIDUCIAL  [MICRO-FIDUCIAL]  106.68,88.85 0 top
FID31  FIDUCIALUFIDUCIAL  [MICRO-FIDUCIAL]  125.35,43.69 0 top
FID32  FIDUCIALUFIDUCIAL  [MICRO-FIDUCIAL]  141.22,7.57 0 top
FID33  FIDUCIALUFIDUCIAL  [MICRO-FIDUCIAL]  146.18,43.69 0 top
FID34  FIDUCIALUFIDUCIAL  [MICRO-FIDUCIAL]  162.05,7.57 0 top
FID35  FIDUCIALUFIDUCIAL  [MICRO-FIDUCIAL]  167,43.69 0 top
FID36  FIDUCIALUFIDUCIAL  [MICRO-FIDUCIAL]  182.88,7.57 0 top
FID37  FIDUCIALUFIDUCIAL  [MICRO-FIDUCIAL]  187.83,43.69 0 top
FID38  FIDUCIALUFIDUCIAL  [MICRO-FIDUCIAL]  203.71,7.57 0 top
FID39  FIDUCIALUFIDUCIAL  [MICRO-FIDUCIAL]  208.66,43.69 0 top
FID40  FIDUCIALUFIDUCIAL  [MICRO-FIDUCIAL]  224.54,7.57 0 top
FID41  FIDUCIALUFIDUCIAL  [MICRO-FIDUCIAL]  125.35,84.33 0 top
FID42  FIDUCIALUFIDUCIAL  [MICRO-FIDUCIAL]  141.22,48.21 0 top
FID43  FIDUCIALUFIDUCIAL  [MICRO-FIDUCIAL]  146.18,84.33 0 top
FID44  FIDUCIALUFIDUCIAL  [MICRO-FIDUCIAL]  162.05,48.21 0 top
FID45  FIDUCIALUFIDUCIAL  [MICRO-FIDUCIAL]  167,84.33 0 top
FID46  FIDUCIALUFIDUCIAL  [MICRO-FIDUCIAL]  182.88,48.21 0 top
FID47  FIDUCIALUFIDUCIAL  [MICRO-FIDUCIAL]  187.83,84.33 0 top
FID48  FIDUCIALUFIDUCIAL  [MICRO-FIDUCIAL]  203.71,48.21 0 top
FID49  FIDUCIALUFIDUCIAL  [MICRO-FIDUCIAL]  208.66,84.33 0 top
FID50  FIDUCIALUFIDUCIAL  [MICRO-FIDUCIAL]  224.54,48.21 0 top
FID51  FIDUCIALUFIDUCIAL  [MICRO-FIDUCIAL]  125.35,124.97 0 top
FID52  FIDUCIALUFIDUCIAL  [MICRO-FIDUCIAL]  141.22,88.85 0 top
FID53  FIDUCIALUFIDUCIAL  [MICRO-FIDUCIAL]  146.18,124.97 0 top
FID54  FIDUCIALUFIDUCIAL  [MICRO-FIDUCIAL]  162.05,88.85 0 top
FID55  FIDUCIALUFIDUCIAL  [MICRO-FIDUCIAL]  167,124.97 0 top
FID56  FIDUCIALUFIDUCIAL  [MICRO-FIDUCIAL]  182.88,88.85 0 top
FID57  FIDUCIALUFIDUCIAL  [MICRO-FIDUCIAL]  187.83,124.97 0 top
FID58  FIDUCIALUFIDUCIAL  [MICRO-FIDUCIAL]  203.71,88.85 0 top
FID59  FIDUCIALUFIDUCIAL  [MICRO-FIDUCIAL]  208.66,124.97 0 top
FID60  FIDUCIALUFIDUCIAL  [MICRO-FIDUCIAL]  224.54,88.85 0 top
J1  LiPo  [JST-2-SMD]  17.02,10.67 180 top
J2  LiPo  [JST-2-SMD]  37.85,10.67 180 top
J3  LiPo  [JST-2-SMD]  58.67,10.67 180 top
J4  LiPo  [JST-2-SMD]  79.5,10.67 180 top
J5  LiPo  [JST-2-SMD]  100.33,10.67 180 top
J6  LiPo  [JST-2-SMD]  17.02,51.31 180 top
J7  LiPo  [JST-2-SMD]  37.85,51.31 180 top
J8  LiPo  [JST-2-SMD]  58.67,51.31 180 top
J9  LiPo  [JST-2-SMD]  79.5,51.31 180 top
J10  LiPo  [JST-2-SMD]  100.33,51.31 180 top
J11  LiPo  [JST-2-SMD]  17.02,91.95 180 top
J12  LiPo  [JST-2-SMD]  37.85,91.95 180 top
J13  LiPo  [JST-2-SMD]  58.67,91.95 180 top
J14  LiPo  [JST-2-SMD]  79.5,91.95 180 top
J15  LiPo  [JST-2-SMD]  100.33,91.95 180 top
J16  LiPo  [JST-2-SMD]  134.87,10.67 180 top
J17  LiPo  [JST-2-SMD]  155.7,10.67 180 top
J18  LiPo  [JST-2-SMD]  176.53,10.67 180 top
J19  LiPo  [JST-2-SMD]  197.36,10.67 180 top
J20  LiPo  [JST-2-SMD]  218.19,10.67 180 top
J21  LiPo  [JST-2-SMD]  134.87,51.31 180 top
J22  LiPo  [JST-2-SMD]  155.7,51.31 180 top
J23  LiPo  [JST-2-SMD]  176.53,51.31 180 top
J24  LiPo  [JST-2-SMD]  197.36,51.31 180 top
J25  LiPo  [JST-2-SMD]  218.19,51.31 180 top
J26  LiPo  [JST-2-SMD]  134.87,91.95 180 top
J27  LiPo  [JST-2-SMD]  155.7,91.95 180 top
J28  LiPo  [JST-2-SMD]  176.53,91.95 180 top
J29  LiPo  [JST-2-SMD]  197.36,91.95 180 top
J30  LiPo  [JST-2-SMD]  218.19,91.95 180 top
JP1  [USB-B-MICRO-SMD_V03]  42.3,42.96 270 top
JP2  [USB-B-MICRO-SMD_V03]  21.47,42.96 270 top
JP3  [1X12]  25.91,8.13 90 bottom
JP4  [1X12]  8.13,8.13 90 bottom
JP5  [1X12]  46.74,8.13 90 bottom
JP6  [1X12]  28.96,8.13 90 bottom
JP7  [USB-B-MICRO-SMD_V03]  63.13,42.96 270 top
JP8  [1X12]  67.56,8.13 90 bottom
JP9  [1X12]  49.78,8.13 90 bottom
JP10  [USB-B-MICRO-SMD_V03]  83.96,42.96 270 top
JP11  [1X12]  88.39,8.13 90 bottom
JP12  [1X12]  70.61,8.13 90 bottom
JP13  [USB-B-MICRO-SMD_V03]  104.78,42.96 270 top
JP14  [1X12]  109.22,8.13 90 bottom
JP15  [1X12]  91.44,8.13 90 bottom
JP16  [USB-B-MICRO-SMD_V03]  21.47,83.6 270 top
JP17  [1X12]  25.91,48.77 90 bottom
JP18  [1X12]  8.13,48.77 90 bottom
JP19  [USB-B-MICRO-SMD_V03]  42.3,83.6 270 top
JP20  [1X12]  46.74,48.77 90 bottom
JP21  [1X12]  28.96,48.77 90 bottom
JP22  [USB-B-MICRO-SMD_V03]  63.13,83.6 270 top
JP23  [1X12]  67.56,48.77 90 bottom
JP24  [1X12]  49.78,48.77 90 bottom
JP25  [USB-B-MICRO-SMD_V03]  83.96,83.6 270 top
JP26  [1X12]  88.39,48.77 90 bottom
JP27  [1X12]  70.61,48.77 90 bottom
JP28  [USB-B-MICRO-SMD_V03]  104.78,83.6 270 top
JP29  [1X12]  109.22,48.77 90 bottom
JP30  [1X12]  91.44,48.77 90 bottom
JP31  [USB-B-MICRO-SMD_V03]  21.47,124.24 270 top
JP32  [1X12]  25.91,89.41 90 bottom
JP33  [1X12]  8.13,89.41 90 bottom
JP34  [USB-B-MICRO-SMD_V03]  42.3,124.24 270 top
JP35  [1X12]  46.74,89.41 90 bottom
JP36  [1X12]  28.96,89.41 90 bottom
JP37  [USB-B-MICRO-SMD_V03]  63.13,124.24 270 top
JP38  [1X12]  67.56,89.41 90 bottom
JP39  [1X12]  49.78,89.41 90 bottom
JP40  [USB-B-MICRO-SMD_V03]  83.96,124.24 270 top
JP41  [1X12]  88.39,89.41 90 bottom
JP42  [1X12]  70.61,89.41 90 bottom
JP43  [USB-B-MICRO-SMD_V03]  104.78,124.24 270 top
JP44  [1X12]  109.22,89.41 90 bottom
JP45  [1X12]  91.44,89.41 90 bottom
JP46  [USB-B-MICRO-SMD_V03]  139.33,42.96 270 top
JP47  [1X12]  143.76,8.13 90 bottom
JP48  [1X12]  125.98,8.13 90 bottom
JP49  [USB-B-MICRO-SMD_V03]  160.16,42.96 270 top
JP50  [1X12]  164.59,8.13 90 bottom
JP51  [1X12]  146.81,8.13 90 bottom
JP52  [USB-B-MICRO-SMD_V03]  180.99,42.96 270 top
JP53  [1X12]  185.42,8.13 90 bottom
JP54  [1X12]  167.64,8.13 90 bottom
JP55  [USB-B-MICRO-SMD_V03]  201.81,42.96 270 top
JP56  [1X12]  206.25,8.13 90 bottom
JP57  [1X12]  188.47,8.13 90 bottom
JP58  [USB-B-MICRO-SMD_V03]  222.64,42.96 270 top
JP59  [1X12]  227.08,8.13 90 bottom
JP60  [1X12]  209.3,8.13 90 bottom
JP61  [USB-B-MICRO-SMD_V03]  139.33,83.6 270 top
JP62  [1X12]  143.76,48.77 90 bottom
JP63  [1X12]  125.98,48.77 90 bottom
JP64  [USB-B-MICRO-SMD_V03]  160.16,83.6 270 top
JP65  [1X12]  164.59,48.77 90 bottom
JP66  [1X12]  146.81,48.77 90 bottom
JP67  [USB-B-MICRO-SMD_V03]  180.99,83.6 270 top
JP68  [1X12]  185.42,48.77 90 bottom
JP69  [1X12]  167.64,48.77 90 bottom
JP70  [USB-B-MICRO-SMD_V03]  201.81,83.6 270 top
JP71  [1X12]  206.25,48.77 90 bottom
JP72  [1X12]  188.47,48.77 90 bottom
JP73  [USB-B-MICRO-SMD_V03]  222.64,83.6 270 top
JP74  [1X12]  227.08,48.77 90 bottom
JP75  [1X12]  209.3,48.77 90 bottom
JP76  [USB-B-MICRO-SMD_V03]  139.33,124.24 270 top
JP77  [1X12]  143.76,89.41 90 bottom
JP78  [1X12]  125.98,89.41 90 bottom
JP79  [USB-B-MICRO-SMD_V03]  160.16,124.24 270 top
JP80  [1X12]  164.59,89.41 90 bottom
JP81  [1X12]  146.81,89.41 90 bottom
JP82  [USB-B-MICRO-SMD_V03]  180.99,124.24 270 top
JP83  [1X12]  185.42,89.41 90 bottom
JP84  [1X12]  167.64,89.41 90 bottom
JP85  [USB-B-MICRO-SMD_V03]  201.81,124.24 270 top
JP86  [1X12]  206.25,89.41 90 bottom
JP87  [1X12]  188.47,89.41 90 bottom
JP88  [USB-B-MICRO-SMD_V03]  222.64,124.24 270 top
JP89  [1X12]  227.08,89.41 90 bottom
JP90  [1X12]  209.3,89.41 90 bottom
LOGO1  OSHW-LOGOS  [OSHW-LOGO-S]  21.89,28.55 0 top
LOGO2  SFE_LOGO_FLAME.1_INCH  [SFE_LOGO_FLAME_.1]  10.03,41.15 0 bottom
LOGO3  SFE_LOGO_FLAME.1_INCH  [SFE_LOGO_FLAME_.1@1]  13.21,18.29 0 top
LOGO4  OSHW-LOGOS  [OSHW-LOGO-S]  42.72,28.55 0 top
LOGO5  SFE_LOGO_FLAME.1_INCH  [SFE_LOGO_FLAME_.1]  30.86,41.15 0 bottom
LOGO6  SFE_LOGO_FLAME.1_INCH  [SFE_LOGO_FLAME_.1@1]  34.04,18.29 0 top
LOGO7  OSHW-LOGOS  [OSHW-LOGO-S]  63.55,28.55 0 top
LOGO8  SFE_LOGO_FLAME.1_INCH  [SFE_LOGO_FLAME_.1]  51.69,41.15 0 bottom
LOGO9  SFE_LOGO_FLAME.1_INCH  [SFE_LOGO_FLAME_.1@1]  54.86,18.29 0 top
LOGO10  OSHW-LOGOS  [OSHW-LOGO-S]  84.38,28.55 0 top
LOGO11  SFE_LOGO_FLAME.1_INCH  [SFE_LOGO_FLAME_.1]  72.52,41.15 0 bottom
LOGO12  SFE_LOGO_FLAME.1_INCH  [SFE_LOGO_FLAME_.1@1]  75.69,18.29 0 top
LOGO13  OSHW-LOGOS  [OSHW-LOGO-S]  105.21,28.55 0 top
LOGO14  SFE_LOGO_FLAME.1_INCH  [SFE_LOGO_FLAME_.1]  93.34,41.15 0 bottom
LOGO15  SFE_LOGO_FLAME.1_INCH  [SFE_LOGO_FLAME_.1@1]  96.52,18.29 0 top
LOGO16  OSHW-LOGOS  [OSHW-LOGO-S]  21.89,69.19 0 top
LOGO17  SFE_LOGO_FLAME.1_INCH  [SFE_LOGO_FLAME_.1]  10.03,81.79 0 bottom
LOGO18  SFE_LOGO_FLAME.1_INCH  [SFE_LOGO_FLAME_.1@1]  13.21,58.93 0 top
LOGO19  OSHW-LOGOS  [OSHW-LOGO-S]  42.72,69.19 0 top
LOGO20  SFE_LOGO_FLAME.1_INCH  [SFE_LOGO_FLAME_.1]  30.86,81.79 0 bottom
LOGO21  SFE_LOGO_FLAME.1_INCH  [SFE_LOGO_FLAME_.1@1]  34.04,58.93 0 top
LOGO22  OSHW-LOGOS  [OSHW-LOGO-S]  63.55,69.19 0 top
LOGO23  SFE_LOGO_FLAME.1_INCH  [SFE_LOGO_FLAME_.1]  51.69,81.79 0 bottom
LOGO24  SFE_LOGO_FLAME.1_INCH  [SFE_LOGO_FLAME_.1@1]  54.86,58.93 0 top
LOGO25  OSHW-LOGOS  [OSHW-LOGO-S]  84.38,69.19 0 top
LOGO26  SFE_LOGO_FLAME.1_INCH  [SFE_LOGO_FLAME_.1]  72.52,81.79 0 bottom
LOGO27  SFE_LOGO_FLAME.1_INCH  [SFE_LOGO_FLAME_.1@1]  75.69,58.93 0 top
LOGO28  OSHW-LOGOS  [OSHW-LOGO-S]  105.21,69.19 0 top
LOGO29  SFE_LOGO_FLAME.1_INCH  [SFE_LOGO_FLAME_.1]  93.34,81.79 0 bottom
LOGO30  SFE_LOGO_FLAME.1_INCH  [SFE_LOGO_FLAME_.1@1]  96.52,58.93 0 top
LOGO31  OSHW-LOGOS  [OSHW-LOGO-S]  21.89,109.83 0 top
LOGO32  SFE_LOGO_FLAME.1_INCH  [SFE_LOGO_FLAME_.1]  10.03,122.43 0 bottom
LOGO33  SFE_LOGO_FLAME.1_INCH  [SFE_LOGO_FLAME_.1@1]  13.21,99.57 0 top
LOGO34  OSHW-LOGOS  [OSHW-LOGO-S]  42.72,109.83 0 top
LOGO35  SFE_LOGO_FLAME.1_INCH  [SFE_LOGO_FLAME_.1]  30.86,122.43 0 bottom
LOGO36  SFE_LOGO_FLAME.1_INCH  [SFE_LOGO_FLAME_.1@1]  34.04,99.57 0 top
LOGO37  OSHW-LOGOS  [OSHW-LOGO-S]  63.55,109.83 0 top
LOGO38  SFE_LOGO_FLAME.1_INCH  [SFE_LOGO_FLAME_.1]  51.69,122.43 0 bottom
LOGO39  SFE_LOGO_FLAME.1_INCH  [SFE_LOGO_FLAME_.1@1]  54.86,99.57 0 top
LOGO40  OSHW-LOGOS  [OSHW-LOGO-S]  84.38,109.83 0 top
LOGO41  SFE_LOGO_FLAME.1_INCH  [SFE_LOGO_FLAME_.1]  72.52,122.43 0 bottom
LOGO42  SFE_LOGO_FLAME.1_INCH  [SFE_LOGO_FLAME_.1@1]  75.69,99.57 0 top
LOGO43  OSHW-LOGOS  [OSHW-LOGO-S]  105.21,109.83 0 top
LOGO44  SFE_LOGO_FLAME.1_INCH  [SFE_LOGO_FLAME_.1]  93.34,122.43 0 bottom
LOGO45  SFE_LOGO_FLAME.1_INCH  [SFE_LOGO_FLAME_.1@1]  96.52,99.57 0 top
LOGO46  OSHW-LOGOS  [OSHW-LOGO-S]  139.75,28.55 0 top
LOGO47  SFE_LOGO_FLAME.1_INCH  [SFE_LOGO_FLAME_.1]  127.89,41.15 0 bottom
LOGO48  SFE_LOGO_FLAME.1_INCH  [SFE_LOGO_FLAME_.1@1]  131.06,18.29 0 top
LOGO49  OSHW-LOGOS  [OSHW-LOGO-S]  160.58,28.55 0 top
LOGO50  SFE_LOGO_FLAME.1_INCH  [SFE_LOGO_FLAME_.1]  148.72,41.15 0 bottom
LOGO51  SFE_LOGO_FLAME.1_INCH  [SFE_LOGO_FLAME_.1@1]  151.89,18.29 0 top
LOGO52  OSHW-LOGOS  [OSHW-LOGO-S]  181.41,28.55 0 top
LOGO53  SFE_LOGO_FLAME.1_INCH  [SFE_LOGO_FLAME_.1]  169.54,41.15 0 bottom
LOGO54  SFE_LOGO_FLAME.1_INCH  [SFE_LOGO_FLAME_.1@1]  172.72,18.29 0 top
LOGO55  OSHW-LOGOS  [OSHW-LOGO-S]  202.23,28.55 0 top
LOGO56  SFE_LOGO_FLAME.1_INCH  [SFE_LOGO_FLAME_.1]  190.37,41.15 0 bottom
LOGO57  SFE_LOGO_FLAME.1_INCH  [SFE_LOGO_FLAME_.1@1]  193.55,18.29 0 top
LOGO58  OSHW-LOGOS  [OSHW-LOGO-S]  223.06,28.55 0 top
LOGO59  SFE_LOGO_FLAME.1_INCH  [SFE_LOGO_FLAME_.1]  211.2,41.15 0 bottom
LOGO60  SFE_LOGO_FLAME.1_INCH  [SFE_LOGO_FLAME_.1@1]  214.38,18.29 0 top
LOGO61  OSHW-LOGOS  [OSHW-LOGO-S]  139.75,69.19 0 top
LOGO62  SFE_LOGO_FLAME.1_INCH  [SFE_LOGO_FLAME_.1]  127.89,81.79 0 bottom
LOGO63  SFE_LOGO_FLAME.1_INCH  [SFE_LOGO_FLAME_.1@1]  131.06,58.93 0 top
LOGO64  OSHW-LOGOS  [OSHW-LOGO-S]  160.58,69.19 0 top
LOGO65  SFE_LOGO_FLAME.1_INCH  [SFE_LOGO_FLAME_.1]  148.72,81.79 0 bottom
LOGO66  SFE_LOGO_FLAME.1_INCH  [SFE_LOGO_FLAME_.1@1]  151.89,58.93 0 top
LOGO67  OSHW-LOGOS  [OSHW-LOGO-S]  181.41,69.19 0 top
LOGO68  SFE_LOGO_FLAME.1_INCH  [SFE_LOGO_FLAME_.1]  169.54,81.79 0 bottom
LOGO69  SFE_LOGO_FLAME.1_INCH  [SFE_LOGO_FLAME_.1@1]  172.72,58.93 0 top
LOGO70  OSHW-LOGOS  [OSHW-LOGO-S]  202.23,69.19 0 top
LOGO71  SFE_LOGO_FLAME.1_INCH  [SFE_LOGO_FLAME_.1]  190.37,81.79 0 bottom
LOGO72  SFE_LOGO_FLAME.1_INCH  [SFE_LOGO_FLAME_.1@1]  193.55,58.93 0 top
LOGO73  OSHW-LOGOS  [OSHW-LOGO-S]  223.06,69.19 0 top
LOGO74  SFE_LOGO_FLAME.1_INCH  [SFE_LOGO_FLAME_.1]  211.2,81.79 0 bottom
LOGO75  SFE_LOGO_FLAME.1_INCH  [SFE_LOGO_FLAME_.1@1]  214.38,58.93 0 top
LOGO76  OSHW-LOGOS  [OSHW-LOGO-S]  139.75,109.83 0 top
LOGO77  SFE_LOGO_FLAME.1_INCH  [SFE_LOGO_FLAME_.1]  127.89,122.43 0 bottom
LOGO78  SFE_LOGO_FLAME.1_INCH  [SFE_LOGO_FLAME_.1@1]  131.06,99.57 0 top
LOGO79  OSHW-LOGOS  [OSHW-LOGO-S]  160.58,109.83 0 top
LOGO80  SFE_LOGO_FLAME.1_INCH  [SFE_LOGO_FLAME_.1]  148.72,122.43 0 bottom
LOGO81  SFE_LOGO_FLAME.1_INCH  [SFE_LOGO_FLAME_.1@1]  151.89,99.57 0 top
LOGO82  OSHW-LOGOS  [OSHW-LOGO-S]  181.41,109.83 0 top
LOGO83  SFE_LOGO_FLAME.1_INCH  [SFE_LOGO_FLAME_.1]  169.54,122.43 0 bottom
LOGO84  SFE_LOGO_FLAME.1_INCH  [SFE_LOGO_FLAME_.1@1]  172.72,99.57 0 top
LOGO85  OSHW-LOGOS  [OSHW-LOGO-S]  202.23,109.83 0 top
LOGO86  SFE_LOGO_FLAME.1_INCH  [SFE_LOGO_FLAME_.1]  190.37,122.43 0 bottom
LOGO87  SFE_LOGO_FLAME.1_INCH  [SFE_LOGO_FLAME_.1@1]  193.55,99.57 0 top
LOGO88  OSHW-LOGOS  [OSHW-LOGO-S]  223.06,109.83 0 top
LOGO89  SFE_LOGO_FLAME.1_INCH  [SFE_LOGO_FLAME_.1]  211.2,122.43 0 bottom
LOGO90  SFE_LOGO_FLAME.1_INCH  [SFE_LOGO_FLAME_.1@1]  214.38,99.57 0 top
Q1  ZXMP6A13FTA  [SOT23-3]  10.67,39.24 90 top
Q2  ZXMP6A13FTA  [SOT23-3]  31.5,39.24 90 top
Q3  ZXMP6A13FTA  [SOT23-3]  52.32,39.24 90 top
Q4  ZXMP6A13FTA  [SOT23-3]  73.15,39.24 90 top
Q5  ZXMP6A13FTA  [SOT23-3]  93.98,39.24 90 top
Q6  ZXMP6A13FTA  [SOT23-3]  10.67,79.88 90 top
Q7  ZXMP6A13FTA  [SOT23-3]  31.5,79.88 90 top
Q8  ZXMP6A13FTA  [SOT23-3]  52.32,79.88 90 top
Q9  ZXMP6A13FTA  [SOT23-3]  73.15,79.88 90 top
Q10  ZXMP6A13FTA  [SOT23-3]  93.98,79.88 90 top
Q11  ZXMP6A13FTA  [SOT23-3]  10.67,120.52 90 top
Q12  ZXMP6A13FTA  [SOT23-3]  31.5,120.52 90 top
Q13  ZXMP6A13FTA  [SOT23-3]  52.32,120.52 90 top
Q14  ZXMP6A13FTA  [SOT23-3]  73.15,120.52 90 top
Q15  ZXMP6A13FTA  [SOT23-3]  93.98,120.52 90 top
Q16  ZXMP6A13FTA  [SOT23-3]  128.52,39.24 90 top
Q17  ZXMP6A13FTA  [SOT23-3]  149.35,39.24 90 top
Q18  ZXMP6A13FTA  [SOT23-3]  170.18,39.24 90 top
Q19  ZXMP6A13FTA  [SOT23-3]  191.01,39.24 90 top
Q20  ZXMP6A13FTA  [SOT23-3]  211.84,39.24 90 top
Q21  ZXMP6A13FTA  [SOT23-3]  128.52,79.88 90 top
Q22  ZXMP6A13FTA  [SOT23-3]  149.35,79.88 90 top
Q23  ZXMP6A13FTA  [SOT23-3]  170.18,79.88 90 top
Q24  ZXMP6A13FTA  [SOT23-3]  191.01,79.88 90 top
Q25  ZXMP6A13FTA  [SOT23-3]  211.84,79.88 90 top
Q26  ZXMP6A13FTA  [SOT23-3]  128.52,120.52 90 top
Q27  ZXMP6A13FTA  [SOT23-3]  149.35,120.52 90 top
Q28  ZXMP6A13FTA  [SOT23-3]  170.18,120.52 90 top
Q29  ZXMP6A13FTA  [SOT23-3]  191.01,120.52 90 top
Q30  ZXMP6A13FTA  [SOT23-3]  211.84,120.52 90 top
R1  1KΩ  [0603-ARV]  20.19,32.26 0 top
R2  1KΩ  [0603-ARV]  13.84,32.26 0 top
R3  22  [0603-RES]  24.64,38.29 0 top
R4  22  [0603-RES]  20.83,38.29 0 top
R5  2.0k  [0603-RES]  17.02,19.24 180 top
R6  100k  [0603-RES]  23.37,25.59 270 top
R7  10K  [0603-RES]  10.55,24.1 90 top
R8  10K  [0603-RES]  10.85,26.9 315 top
R9  2.0k  [0603-RES]  37.85,19.24 180 top
R10  22  [0603-RES]  45.47,38.29 0 top
R11  4.7K  [0603-RES]  11.3,9.4 270 top
R12  4.7K  [0603-RES]  22.73,9.4 270 top
R13  22  [0603-RES]  41.66,38.29 0 top
R14  100k  [0603-RES]  44.2,25.59 270 top
R15  10K  [0603-RES]  31.38,24.1 90 top
R16  4.7K  [0603-RES]  32.13,9.4 270 top
R17  4.7K  [0603-RES]  43.56,9.4 270 top
R18  1KΩ  [0603-ARV]  41.02,32.26 0 top
R19  1KΩ  [0603-ARV]  34.67,32.26 0 top
R20  10K  [0603-RES]  31.67,26.9 315 top
R21  2.0k  [0603-RES]  58.67,19.24 180 top
R22  22  [0603-RES]  66.29,38.29 0 top
R23  22  [0603-RES]  62.48,38.29 0 top
R24  100k  [0603-RES]  65.02,25.59 270 top
R25  10K  [0603-RES]  52.21,24.1 90 top
R26  4.7K  [0603-RES]  52.96,9.4 270 top
R27  4.7K  [0603-RES]  64.39,9.4 270 top
R28  1KΩ  [0603-ARV]  61.85,32.26 0 top
R29  1KΩ  [0603-ARV]  55.5,32.26 0 top
R30  10K  [0603-RES]  52.5,26.9 315 top
R31  2.0k  [0603-RES]  79.5,19.24 180 top
R32  22  [0603-RES]  87.12,38.29 0 top
R33  22  [0603-RES]  83.31,38.29 0 top
R34  100k  [0603-RES]  85.85,25.59 270 top
R35  10K  [0603-RES]  73.04,24.1 90 top
R36  4.7K  [0603-RES]  73.79,9.4 270 top
R37  4.7K  [0603-RES]  85.22,9.4 270 top
R38  1KΩ  [0603-ARV]  82.68,32.26 0 top
R39  1KΩ  [0603-ARV]  76.33,32.26 0 top
R40  10K  [0603-RES]  73.33,26.9 315 top
R41  2.0k  [0603-RES]  100.33,19.24 180 top
R42  22  [0603-RES]  107.95,38.29 0 top
R43  22  [0603-RES]  104.14,38.29 0 top
R44  100k  [0603-RES]  106.68,25.59 270 top
R45  10K  [0603-RES]  93.87,24.1 90 top
R46  4.7K  [0603-RES]  94.61,9.4 270 top
R47  4.7K  [0603-RES]  106.05,9.4 270 top
R48  1KΩ  [0603-ARV]  103.5,32.26 0 top
R49  1KΩ  [0603-ARV]  97.16,32.26 0 top
R50  10K  [0603-RES]  94.16,26.9 315 top
R51  2.0k  [0603-RES]  17.02,59.88 180 top
R52  22  [0603-RES]  24.64,78.93 0 top
R53  22  [0603-RES]  20.83,78.93 0 top
R54  100k  [0603-RES]  23.37,66.23 270 top
R55  10K  [0603-RES]  10.55,64.74 90 top
R56  4.7K  [0603-RES]  11.3,50.04 270 top
R57  4.7K  [0603-RES]  22.73,50.04 270 top
R58  1KΩ  [0603-ARV]  20.19,72.9 0 top
R59  1KΩ  [0603-ARV]  13.84,72.9 0 top
R60  10K  [0603-RES]  10.85,67.54 315 top
R61  2.0k  [0603-RES]  37.85,59.88 180 top
R62  22  [0603-RES]  45.47,78.93 0 top
R63  22  [0603-RES]  41.66,78.93 0 top
R64  100k  [0603-RES]  44.2,66.23 270 top
R65  10K  [0603-RES]  31.38,64.74 90 top
R66  4.7K  [0603-RES]  32.13,50.04 270 top
R67  4.7K  [0603-RES]  43.56,50.04 270 top
R68  1KΩ  [0603-ARV]  41.02,72.9 0 top
R69  1KΩ  [0603-ARV]  34.67,72.9 0 top
R70  10K  [0603-RES]  31.67,67.54 315 top
R71  2.0k  [0603-RES]  58.67,59.88 180 top
R72  22  [0603-RES]  66.29,78.93 0 top
R73  22  [0603-RES]  62.48,78.93 0 top
R74  100k  [0603-RES]  65.02,66.23 270 top
R75  10K  [0603-RES]  52.21,64.74 90 top
R76  4.7K  [0603-RES]  52.96,50.04 270 top
R77  4.7K  [0603-RES]  64.39,50.04 270 top
R78  1KΩ  [0603-ARV]  61.85,72.9 0 top
R79  1KΩ  [0603-ARV]  55.5,72.9 0 top
R80  10K  [0603-RES]  52.5,67.54 315 top
R81  2.0k  [0603-RES]  79.5,59.88 180 top
R82  22  [0603-RES]  87.12,78.93 0 top
R83  22  [0603-RES]  83.31,78.93 0 top
R84  100k  [0603-RES]  85.85,66.23 270 top
R85  10K  [0603-RES]  73.04,64.74 90 top
R86  4.7K  [0603-RES]  73.79,50.04 270 top
R87  4.7K  [0603-RES]  85.22,50.04 270 top
R88  1KΩ  [0603-ARV]  82.68,72.9 0 top
R89  1KΩ  [0603-ARV]  76.33,72.9 0 top
R90  10K  [0603-RES]  73.33,67.54 315 top
R91  2.0k  [0603-RES]  100.33,59.88 180 top
R92  22  [0603-RES]  107.95,78.93 0 top
R93  22  [0603-RES]  104.14,78.93 0 top
R94  100k  [0603-RES]  106.68,66.23 270 top
R95  10K  [0603-RES]  93.87,64.74 90 top
R96  4.7K  [0603-RES]  94.61,50.04 270 top
R97  4.7K  [0603-RES]  106.05,50.04 270 top
R98  1KΩ  [0603-ARV]  103.5,72.9 0 top
R99  1KΩ  [0603-ARV]  97.16,72.9 0 top
R100  10K  [0603-RES]  94.16,67.54 315 top
R101  2.0k  [0603-RES]  17.02,100.52 180 top
R102  22  [0603-RES]  24.64,119.57 0 top
R103  22  [0603-RES]  20.83,119.57 0 top
R104  100k  [0603-RES]  23.37,106.87 270 top
R105  10K  [0603-RES]  10.55,105.38 90 top
R106  4.7K  [0603-RES]  11.3,90.68 270 top
R107  4.7K  [0603-RES]  22.73,90.68 270 top
R108  1KΩ  [0603-ARV]  20.19,113.54 0 top
R109  1KΩ  [0603-ARV]  13.84,113.54 0 top
R110  10K  [0603-RES]  10.85,108.18 315 top
R111  2.0k  [0603-RES]  37.85,100.52 180 top
R112  22  [0603-RES]  45.47,119.57 0 top
R113  22  [0603-RES]  41.66,119.57 0 top
R114  100k  [0603-RES]  44.2,106.87 270 top
R115  10K  [0603-RES]  31.38,105.38 90 top
R116  4.7K  [0603-RES]  32.13,90.68 270 top
R117  4.7K  [0603-RES]  43.56,90.68 270 top
R118  1KΩ  [0603-ARV]  41.02,113.54 0 top
R119  1KΩ  [0603-ARV]  34.67,113.54 0 top
R120  10K  [0603-RES]  31.67,108.18 315 top
R121  2.0k  [0603-RES]  58.67,100.52 180 top
R122  22  [0603-RES]  66.29,119.57 0 top
R123  22  [0603-RES]  62.48,119.57 0 top
R124  100k  [0603-RES]  65.02,106.87 270 top
R125  10K  [0603-RES]  52.21,105.38 90 top
R126  4.7K  [0603-RES]  52.96,90.68 270 top
R127  4.7K  [0603-RES]  64.39,90.68 270 top
R128  1KΩ  [0603-ARV]  61.85,113.54 0 top
R129  1KΩ  [0603-ARV]  55.5,113.54 0 top
R130  10K  [0603-RES]  52.5,108.18 315 top
R131  2.0k  [0603-RES]  79.5,100.52 180 top
R132  22  [0603-RES]  87.12,119.57 0 top
R133  22  [0603-RES]  83.31,119.57 0 top
R134  100k  [0603-RES]  85.85,106.87 270 top
R135  10K  [0603-RES]  73.04,105.38 90 top
R136  4.7K  [0603-RES]  73.79,90.68 270 top
R137  4.7K  [0603-RES]  85.22,90.68 270 top
R138  1KΩ  [0603-ARV]  82.68,113.54 0 top
R139  1KΩ  [0603-ARV]  76.33,113.54 0 top
R140  10K  [0603-RES]  73.33,108.18 315 top
R141  2.0k  [0603-RES]  100.33,100.52 180 top
R142  22  [0603-RES]  107.95,119.57 0 top
R143  22  [0603-RES]  104.14,119.57 0 top
R144  100k  [0603-RES]  106.68,106.87 270 top
R145  10K  [0603-RES]  93.87,105.38 90 top
R146  4.7K  [0603-RES]  94.61,90.68 270 top
R147  4.7K  [0603-RES]  106.05,90.68 270 top
R148  1KΩ  [0603-ARV]  103.5,113.54 0 top
R149  1KΩ  [0603-ARV]  97.16,113.54 0 top
R150  10K  [0603-RES]  94.16,108.18 315 top
R151  2.0k  [0603-RES]  134.87,19.24 180 top
R152  22  [0603-RES]  142.49,38.29 0 top
R153  22  [0603-RES]  138.68,38.29 0 top
R154  100k  [0603-RES]  141.22,25.59 270 top
R155  10K  [0603-RES]  128.41,24.1 90 top
R156  4.7K  [0603-RES]  129.16,9.4 270 top
R157  4.7K  [0603-RES]  140.59,9.4 270 top
R158  1KΩ  [0603-ARV]  138.05,32.26 0 top
R159  1KΩ  [0603-ARV]  131.7,32.26 0 top
R160  10K  [0603-RES]  128.7,26.9 315 top
R161  2.0k  [0603-RES]  155.7,19.24 180 top
R162  22  [0603-RES]  163.32,38.29 0 top
R163  22  [0603-RES]  159.51,38.29 0 top
R164  100k  [0603-RES]  162.05,25.59 270 top
R165  10K  [0603-RES]  149.24,24.1 90 top
R166  4.7K  [0603-RES]  149.99,9.4 270 top
R167  4.7K  [0603-RES]  161.42,9.4 270 top
R168  1KΩ  [0603-ARV]  158.88,32.26 0 top
R169  1KΩ  [0603-ARV]  152.53,32.26 0 top
R170  10K  [0603-RES]  149.53,26.9 315 top
R171  2.0k  [0603-RES]  176.53,19.24 180 top
R172  22  [0603-RES]  184.15,38.29 0 top
R173  22  [0603-RES]  180.34,38.29 0 top
R174  100k  [0603-RES]  182.88,25.59 270 top
R175  10K  [0603-RES]  170.07,24.1 90 top
R176  4.7K  [0603-RES]  170.81,9.4 270 top
R177  4.7K  [0603-RES]  182.25,9.4 270 top
R178  1KΩ  [0603-ARV]  179.71,32.26 0 top
R179  1KΩ  [0603-ARV]  173.35,32.26 0 top
R180  10K  [0603-RES]  170.36,26.9 315 top
R181  2.0k  [0603-RES]  197.36,19.24 180 top
R182  22  [0603-RES]  204.98,38.29 0 top
R183  22  [0603-RES]  201.17,38.29 0 top
R184  100k  [0603-RES]  203.71,25.59 270 top
R185  10K  [0603-RES]  190.89,24.1 90 top
R186  4.7K  [0603-RES]  191.64,9.4 270 top
R187  4.7K  [0603-RES]  203.07,9.4 270 top
R188  1KΩ  [0603-ARV]  200.53,32.26 0 top
R189  1KΩ  [0603-ARV]  194.18,32.26 0 top
R190  10K  [0603-RES]  191.19,26.9 315 top
R191  2.0k  [0603-RES]  218.19,19.24 180 top
R192  22  [0603-RES]  225.81,38.29 0 top
R193  22  [0603-RES]  222,38.29 0 top
R194  100k  [0603-RES]  224.54,25.59 270 top
R195  10K  [0603-RES]  211.72,24.1 90 top
R196  4.7K  [0603-RES]  212.47,9.4 270 top
R197  4.7K  [0603-RES]  223.9,9.4 270 top
R198  1KΩ  [0603-ARV]  221.36,32.26 0 top
R199  1KΩ  [0603-ARV]  215.01,32.26 0 top
R200  10K  [0603-RES]  212.01,26.9 315 top
R201  2.0k  [0603-RES]  134.87,59.88 180 top
R202  22  [0603-RES]  142.49,78.93 0 top
R203  22  [0603-RES]  138.68,78.93 0 top
R204  100k  [0603-RES]  141.22,66.23 270 top
R205  10K  [0603-RES]  128.41,64.74 90 top
R206  4.7K  [0603-RES]  129.16,50.04 270 top
R207  4.7K  [0603-RES]  140.59,50.04 270 top
R208  1KΩ  [0603-ARV]  138.05,72.9 0 top
R209  1KΩ  [0603-ARV]  131.7,72.9 0 top
R210  10K  [0603-RES]  128.7,67.54 315 top
R211  2.0k  [0603-RES]  155.7,59.88 180 top
R212  22  [0603-RES]  163.32,78.93 0 top
R213  22  [0603-RES]  159.51,78.93 0 top
R214  100k  [0603-RES]  162.05,66.23 270 top
R215  10K  [0603-RES]  149.24,64.74 90 top
R216  4.7K  [0603-RES]  149.99,50.04 270 top
R217  4.7K  [0603-RES]  161.42,50.04 270 top
R218  1KΩ  [0603-ARV]  158.88,72.9 0 top
R219  1KΩ  [0603-ARV]  152.53,72.9 0 top
R220  10K  [0603-RES]  149.53,67.54 315 top
R221  2.0k  [0603-RES]  176.53,59.88 180 top
R222  22  [0603-RES]  184.15,78.93 0 top
R223  22  [0603-RES]  180.34,78.93 0 top
R224  100k  [0603-RES]  182.88,66.23 270 top
R225  10K  [0603-RES]  170.07,64.74 90 top
R226  4.7K  [0603-RES]  170.81,50.04 270 top
R227  4.7K  [0603-RES]  182.25,50.04 270 top
R228  1KΩ  [0603-ARV]  179.71,72.9 0 top
R229  1KΩ  [0603-ARV]  173.35,72.9 0 top
R230  10K  [0603-RES]  170.36,67.54 315 top
R231  2.0k  [0603-RES]  197.36,59.88 180 top
R232  22  [0603-RES]  204.98,78.93 0 top
R233  22  [0603-RES]  201.17,78.93 0 top
R234  100k  [0603-RES]  203.71,66.23 270 top
R235  10K  [0603-RES]  190.89,64.74 90 top
R236  4.7K  [0603-RES]  191.64,50.04 270 top
R237  4.7K  [0603-RES]  203.07,50.04 270 top
R238  1KΩ  [0603-ARV]  200.53,72.9 0 top
R239  1KΩ  [0603-ARV]  194.18,72.9 0 top
R240  10K  [0603-RES]  191.19,67.54 315 top
R241  2.0k  [0603-RES]  218.19,59.88 180 top
R242  22  [0603-RES]  225.81,78.93 0 top
R243  22  [0603-RES]  222,78.93 0 top
R244  100k  [0603-RES]  224.54,66.23 270 top
R245  10K  [0603-RES]  211.72,64.74 90 top
R246  4.7K  [0603-RES]  212.47,50.04 270 top
R247  4.7K  [0603-RES]  223.9,50.04 270 top
R248  1KΩ  [0603-ARV]  221.36,72.9 0 top
R249  1KΩ  [0603-ARV]  215.01,72.9 0 top
R250  10K  [0603-RES]  212.01,67.54 315 top
R251  2.0k  [0603-RES]  134.87,100.52 180 top
R252  22  [0603-RES]  142.49,119.57 0 top
R253  22  [0603-RES]  138.68,119.57 0 top
R254  100k  [0603-RES]  141.22,106.87 270 top
R255  10K  [0603-RES]  128.41,105.38 90 top
R256  4.7K  [0603-RES]  129.16,90.68 270 top
R257  4.7K  [0603-RES]  140.59,90.68 270 top
R258  1KΩ  [0603-ARV]  138.05,113.54 0 top
R259  1KΩ  [0603-ARV]  131.7,113.54 0 top
R260  10K  [0603-RES]  128.7,108.18 315 top
R261  2.0k  [0603-RES]  155.7,100.52 180 top
R262  22  [0603-RES]  163.32,119.57 0 top
R263  22  [0603-RES]  159.51,119.57 0 top
R264  100k  [0603-RES]  162.05,106.87 270 top
R265  10K  [0603-RES]  149.24,105.38 90 top
R266  4.7K  [0603-RES]  149.99,90.68 270 top
R267  4.7K  [0603-RES]  161.42,90.68 270 top
R268  1KΩ  [0603-ARV]  158.88,113.54 0 top
R269  1KΩ  [0603-ARV]  152.53,113.54 0 top
R270  10K  [0603-RES]  149.53,108.18 315 top
R271  2.0k  [0603-RES]  176.53,100.52 180 top
R272  22  [0603-RES]  184.15,119.57 0 top
R273  22  [0603-RES]  180.34,119.57 0 top
R274  100k  [0603-RES]  182.88,106.87 270 top
R275  10K  [0603-RES]  170.07,105.38 90 top
R276  4.7K  [0603-RES]  170.81,90.68 270 top
R277  4.7K  [0603-RES]  182.25,90.68 270 top
R278  1KΩ  [0603-ARV]  179.71,113.54 0 top
R279  1KΩ  [0603-ARV]  173.35,113.54 0 top
R280  10K  [0603-RES]  170.36,108.18 315 top
R281  2.0k  [0603-RES]  197.36,100.52 180 top
R282  22  [0603-RES]  204.98,119.57 0 top
R283  22  [0603-RES]  201.17,119.57 0 top
R284  100k  [0603-RES]  203.71,106.87 270 top
R285  10K  [0603-RES]  190.89,105.38 90 top
R286  4.7K  [0603-RES]  191.64,90.68 270 top
R287  4.7K  [0603-RES]  203.07,90.68 270 top
R288  1KΩ  [0603-ARV]  200.53,113.54 0 top
R289  1KΩ  [0603-ARV]  194.18,113.54 0 top
R290  10K  [0603-RES]  191.19,108.18 315 top
R291  2.0k  [0603-RES]  218.19,100.52 180 top
R292  22  [0603-RES]  225.81,119.57 0 top
R293  22  [0603-RES]  222,119.57 0 top
R294  100k  [0603-RES]  224.54,106.87 270 top
R295  10K  [0603-RES]  211.72,105.38 90 top
R296  4.7K  [0603-RES]  212.47,90.68 270 top
R297  4.7K  [0603-RES]  223.9,90.68 270 top
R298  1KΩ  [0603-ARV]  221.36,113.54 0 top
R299  1KΩ  [0603-ARV]  215.01,113.54 0 top
R300  10K  [0603-RES]  212.01,108.18 315 top
S1  POWER  [SWITCH-SPST-SMD-A]  11.94,43.43 0 top
S2  POWER  [SWITCH-SPST-SMD-A]  32.77,43.43 0 top
S3  POWER  [SWITCH-SPST-SMD-A]  53.59,43.43 0 top
S4  POWER  [SWITCH-SPST-SMD-A]  74.42,43.43 0 top
S5  POWER  [SWITCH-SPST-SMD-A]  95.25,43.43 0 top
S6  POWER  [SWITCH-SPST-SMD-A]  11.94,84.07 0 top
S7  POWER  [SWITCH-SPST-SMD-A]  32.77,84.07 0 top
S8  POWER  [SWITCH-SPST-SMD-A]  53.59,84.07 0 top
S9  POWER  [SWITCH-SPST-SMD-A]  74.42,84.07 0 top
S10  POWER  [SWITCH-SPST-SMD-A]  95.25,84.07 0 top
S11  POWER  [SWITCH-SPST-SMD-A]  11.94,124.71 0 top
S12  POWER  [SWITCH-SPST-SMD-A]  32.77,124.71 0 top
S13  POWER  [SWITCH-SPST-SMD-A]  53.59,124.71 0 top
S14  POWER  [SWITCH-SPST-SMD-A]  74.42,124.71 0 top
S15  POWER  [SWITCH-SPST-SMD-A]  95.25,124.71 0 top
S16  POWER  [SWITCH-SPST-SMD-A]  129.79,43.43 0 top
S17  POWER  [SWITCH-SPST-SMD-A]  150.62,43.43 0 top
S18  POWER  [SWITCH-SPST-SMD-A]  171.45,43.43 0 top
S19  POWER  [SWITCH-SPST-SMD-A]  192.28,43.43 0 top
S20  POWER  [SWITCH-SPST-SMD-A]  213.11,43.43 0 top
S21  POWER  [SWITCH-SPST-SMD-A]  129.79,84.07 0 top
S22  POWER  [SWITCH-SPST-SMD-A]  150.62,84.07 0 top
S23  POWER  [SWITCH-SPST-SMD-A]  171.45,84.07 0 top
S24  POWER  [SWITCH-SPST-SMD-A]  192.28,84.07 0 top
S25  POWER  [SWITCH-SPST-SMD-A]  213.11,84.07 0 top
S26  POWER  [SWITCH-SPST-SMD-A]  129.79,124.71 0 top
S27  POWER  [SWITCH-SPST-SMD-A]  150.62,124.71 0 top
S28  POWER  [SWITCH-SPST-SMD-A]  171.45,124.71 0 top
S29  POWER  [SWITCH-SPST-SMD-A]  192.28,124.71 0 top
S30  POWER  [SWITCH-SPST-SMD-A]  213.11,124.71 0 top
SJ1  [PAD-JUMPER-3-2OF3_NC_BY_TRACE_YES_SILK_FULL_BOX]  13.21,17.65 0 bottom
SJ2  [PAD-JUMPER-3-2OF3_NC_BY_TRACE_YES_SILK_FULL_BOX]  34.04,17.65 0 bottom
SJ3  [PAD-JUMPER-3-2OF3_NC_BY_TRACE_YES_SILK_FULL_BOX]  54.86,17.65 0 bottom
SJ4  [PAD-JUMPER-3-2OF3_NC_BY_TRACE_YES_SILK_FULL_BOX]  75.69,17.65 0 bottom
SJ5  [PAD-JUMPER-3-2OF3_NC_BY_TRACE_YES_SILK_FULL_BOX]  96.52,17.65 0 bottom
SJ6  [PAD-JUMPER-3-2OF3_NC_BY_TRACE_YES_SILK_FULL_BOX]  13.21,58.29 0 bottom
SJ7  [PAD-JUMPER-3-2OF3_NC_BY_TRACE_YES_SILK_FULL_BOX]  34.04,58.29 0 bottom
SJ8  [PAD-JUMPER-3-2OF3_NC_BY_TRACE_YES_SILK_FULL_BOX]  54.86,58.29 0 bottom
SJ9  [PAD-JUMPER-3-2OF3_NC_BY_TRACE_YES_SILK_FULL_BOX]  75.69,58.29 0 bottom
SJ10  [PAD-JUMPER-3-2OF3_NC_BY_TRACE_YES_SILK_FULL_BOX]  96.52,58.29 0 bottom
SJ11  [PAD-JUMPER-3-2OF3_NC_BY_TRACE_YES_SILK_FULL_BOX]  13.21,98.93 0 bottom
SJ12  [PAD-JUMPER-3-2OF3_NC_BY_TRACE_YES_SILK_FULL_BOX]  34.04,98.93 0 bottom
SJ13  [PAD-JUMPER-3-2OF3_NC_BY_TRACE_YES_SILK_FULL_BOX]  54.86,98.93 0 bottom
SJ14  [PAD-JUMPER-3-2OF3_NC_BY_TRACE_YES_SILK_FULL_BOX]  75.69,98.93 0 bottom
SJ15  [PAD-JUMPER-3-2OF3_NC_BY_TRACE_YES_SILK_FULL_BOX]  96.52,98.93 0 bottom
SJ16  [PAD-JUMPER-3-2OF3_NC_BY_TRACE_YES_SILK_FULL_BOX]  131.06,17.65 0 bottom
SJ17  [PAD-JUMPER-3-2OF3_NC_BY_TRACE_YES_SILK_FULL_BOX]  151.89,17.65 0 bottom
SJ18  [PAD-JUMPER-3-2OF3_NC_BY_TRACE_YES_SILK_FULL_BOX]  172.72,17.65 0 bottom
SJ19  [PAD-JUMPER-3-2OF3_NC_BY_TRACE_YES_SILK_FULL_BOX]  193.55,17.65 0 bottom
SJ20  [PAD-JUMPER-3-2OF3_NC_BY_TRACE_YES_SILK_FULL_BOX]  214.38,17.65 0 bottom
SJ21  [PAD-JUMPER-3-2OF3_NC_BY_TRACE_YES_SILK_FULL_BOX]  131.06,58.29 0 bottom